# EAGLE board battery-check-6V (EAGLE 5.07)
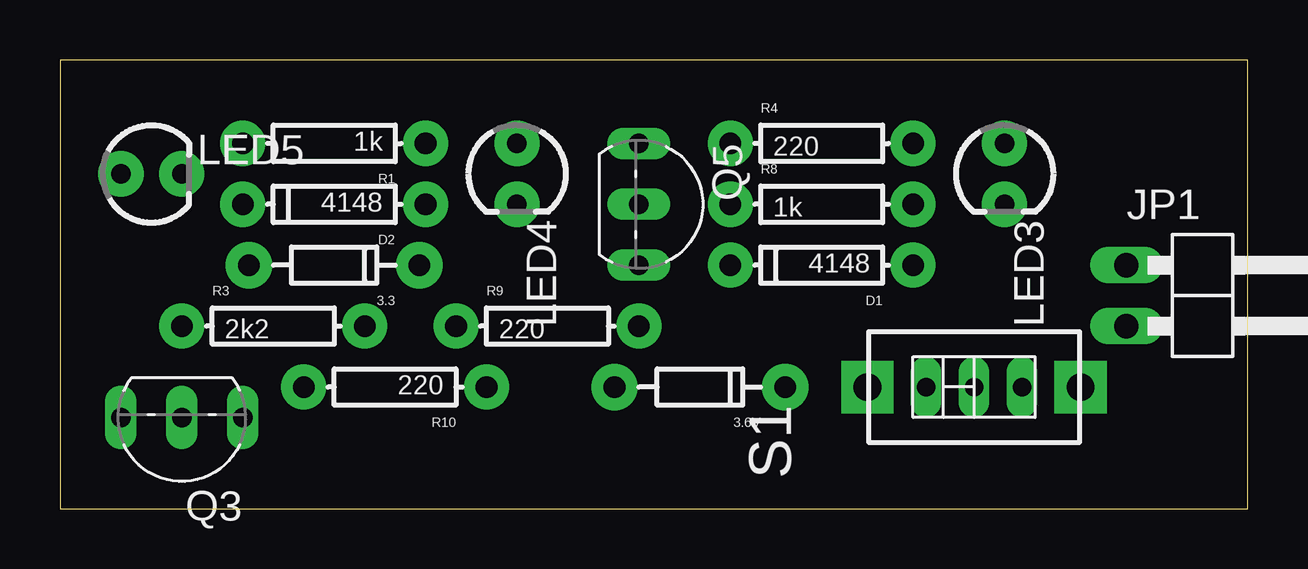
[diagram p0: board, top side]
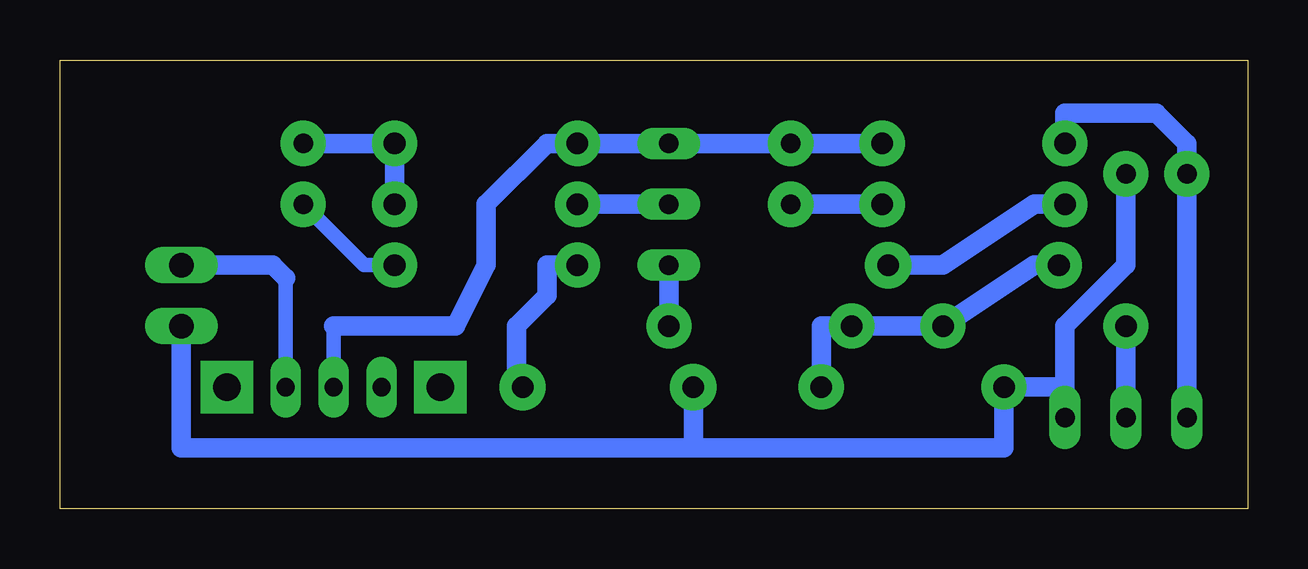
[diagram p1: board, bottom side, seen from below]

Size 49.51 x 18.72 mm. Coordinates in mm from the lower left corner, seen from the top.
Outline: 0,0 49.51,0 49.51,18.72 0,18.72 0,0
Copper layers (1*16): Top 0.035mm / dielectric 1.5mm / Bottom 0.035mm
Design rules "default": minimum track width 10mil, minimum drill 24mil, track to track 8mil, track to pad 8mil, pad to pad 8mil, via to via 8mil, smd to smd 8mil, copper to edge 40mil, drill to drill 8mil, minimum pad ring 10mil, minimum via ring 8mil, stop-mask expansion 4mil, vias tented up to drill 0mil, thermal gap 10mil

## Footprints (pad centres in the part's own frame; a part is rotated, then mirrored left to right if it is on the bottom)
DIODE-ZENER = drill 0.9 pad 1.93 round: P$1 -3.556,0; P$2 3.556,0
DIODE-1N4148 = drill 0.9 pad 1.88 round: A -3.81,0; C 3.81,0
1X02/90 = drill 1.016 long: 1 -1.27,-3.81; 2 1.27,-3.81
LED3MM = drill 0.813 pad 1.88 round: A -1.27,0; K 1.27,0
TO92-EBC = drill 0.813 long: B 0,-1.27; C 2.54,-1.27; E -2.54,-1.27
AXIAL-0.3 = drill 0.9 pad 1.88 round: P$1 -3.81,0; P$2 3.81,0
SWITCH-SPDT-AM#6 = drill 0.762 pad 1.27 long: 1 0,2; 2 0,0; 3 0,-2 | drill 1.15 pad 2.184 square: P$1 0,-4.445; P$2 0,4.445
TO92-CLP = drill 0.813 octagon: A 0,1.905; C 1.27,0; R -1.27,0

## Placement (x,y rotation side)
3.3  [DIODE-ZENER]  11.43,10.16 180 top
3.6V  [DIODE-ZENER]  26.67,5.08 180 top
D1  4148  [DIODE-1N4148]  31.75,10.16 180 top
D2  4148  [DIODE-1N4148]  11.43,12.7 180 top
JP1  [1X02/90]  48.26,8.89 270 top
LED3  green  [LED3MM]  39.37,13.97 270 top
LED4  yellow  [LED3MM]  19.05,13.97 270 top
LED5  red  [LED3MM]  3.81,13.97 0 top
Q3  9013  [TO92-EBC]  5.08,2.54 180 top
Q5  9012  [TO92-EBC]  25.4,12.7 270 top
R1  1k  [AXIAL-0.3]  11.43,15.24 180 top
R3  2k2  [AXIAL-0.3]  8.89,7.62 0 top
R4  220  [AXIAL-0.3]  31.75,15.24 0 top
R8  1k  [AXIAL-0.3]  31.75,12.7 0 top
R9  220  [AXIAL-0.3]  20.32,7.62 0 top
R10  220  [AXIAL-0.3]  13.97,5.08 180 top
S1  [SWITCH-SPDT-AM#6]  38.1,5.08 90 top
VR1  TL431  [TO92-CLP]  55.88,8.89 0 top  (outside the outline)

## Library data of the parts
3.3 3.6V LED3-LED5 Q3 Q5 R1 R3 R4 R8-R10 S1 = digital-toy
D1 D2 = SparkFun
JP1 = pinhead
VR1 = v-reg

## Nets
GND: 3.6V.P$2 JP1.2 LED5.K Q3.E R10.P$2
N$1: JP1.1 S1.3
N$2: D2.A LED4.K
N$3: 3.3.P$2 R3.P$2 R9.P$1 R10.P$1
N$4: Q3.B R3.P$1
N$5: LED5.A Q3.C R1.P$2
N$6: D1.A LED3.K
N$7: 3.6V.P$1 D1.C
N$8: Q5.C R9.P$2
N$9: Q5.B R8.P$1
N$10: LED3.A R4.P$2 R8.P$2
N$11: 3.3.P$1 D2.C
N$12: LED4.A Q5.E R1.P$1 R4.P$1 S1.2

## Tracks (layer width: path | path; a pad name or v marks a point on that pad's centre or on a via)
GND
  Bottom 0.813: Q3.E 7.62,5.08 | 7.62,5.08 7.62,7.62 5.08,10.16 LED5.K | JP1.2 44.45,2.54 22.86,2.54 | 22.86,2.54 10.16,2.54 R10.P$2 7.62,5.08 | 3.6V.P$2 23.11,2.79 22.86,2.54
N$1
  Bottom 0.61: S1.3 40.1,9.62
  Bottom 0.813: 40.1,9.62 40.64,10.16 JP1.1
N$2
  Bottom 0.813: D2.A LED4.K
N$3
  Bottom 0.813: 3.3.P$2 8.89,10.16 R3.P$2 R9.P$1 17.78,7.62 R10.P$1
N$4
  Bottom 0.813: Q3.B R3.P$1
N$5
  Bottom 0.813: Q3.C LED5.A 2.54,15.24 3.81,16.51 7.62,16.51 R1.P$2
N$6
  Bottom 0.61: D1.A 36.83,10.16 LED3.K
N$7
  Bottom 0.813: D1.C 29.21,10.16 29.21,8.89 30.48,7.62 30.48,5.08 3.6V.P$1
N$8
  Bottom 0.813: R9.P$2 Q5.C
N$9
  Bottom 0.813: Q5.B R8.P$1
N$10
  Bottom 0.813: R8.P$2 R4.P$2 LED3.A
N$11
  Bottom 0.813: 3.3.P$1 12.7,10.16 8.89,12.7 D2.C
N$12
  Bottom 0.61: 38.1,7.62 S1.2
  Bottom 0.813: R1.P$1 LED4.A Q5.E R4.P$1 29.21,15.24 31.75,12.7 31.75,10.16 33.02,7.62 38.1,7.62